# Altium PCB PCB1.PcbDoc
Units mil, origin at the board's own origin, x right, y up, seen from the top; angles counter-clockwise.
Board outline 2010 x 2300 mil, 2 copper layers (Top Layer, Bottom Layer); 6 components, 5 nets, 21 pads, 0 vias.
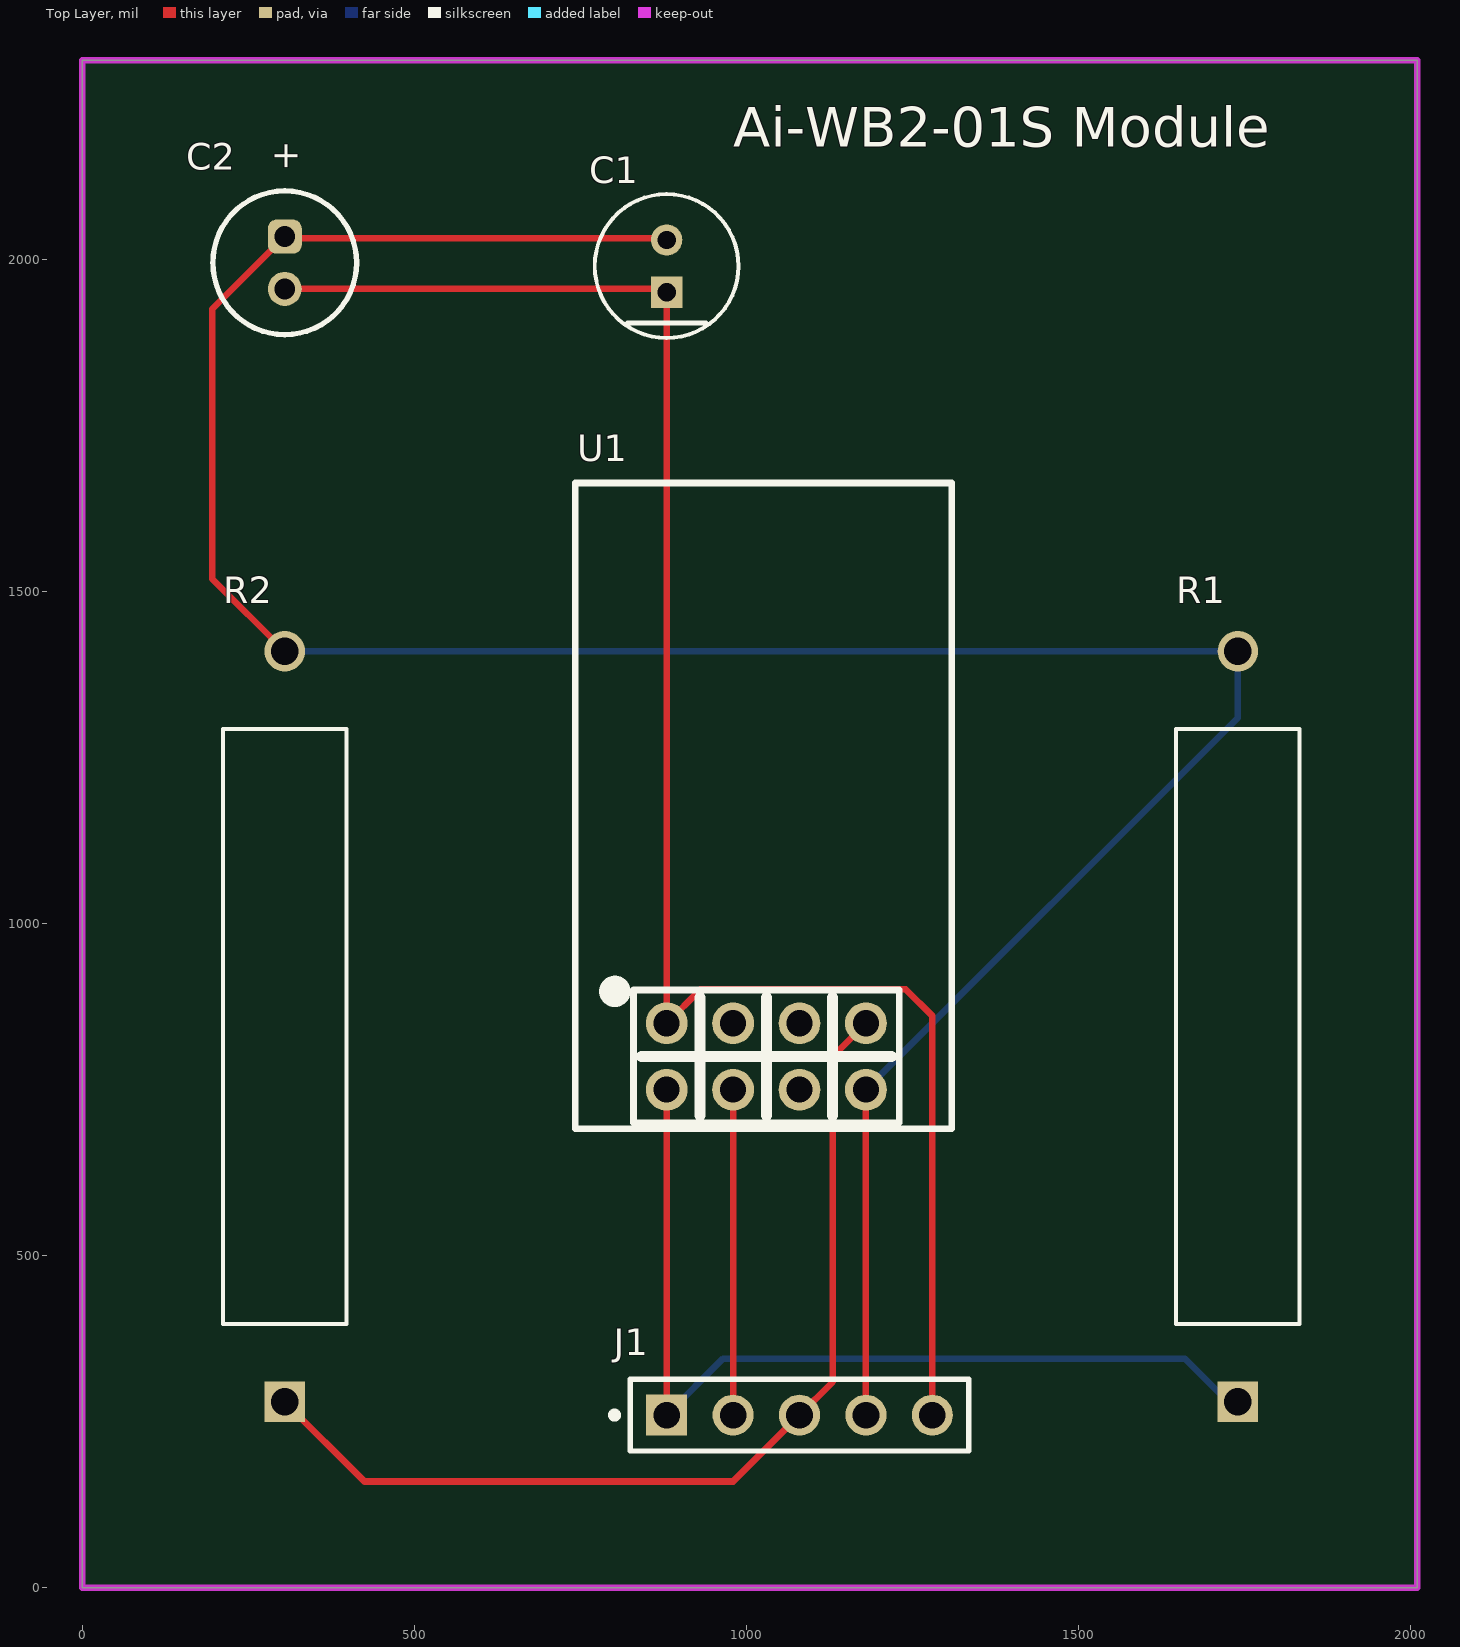
[diagram p0: Top Layer view]
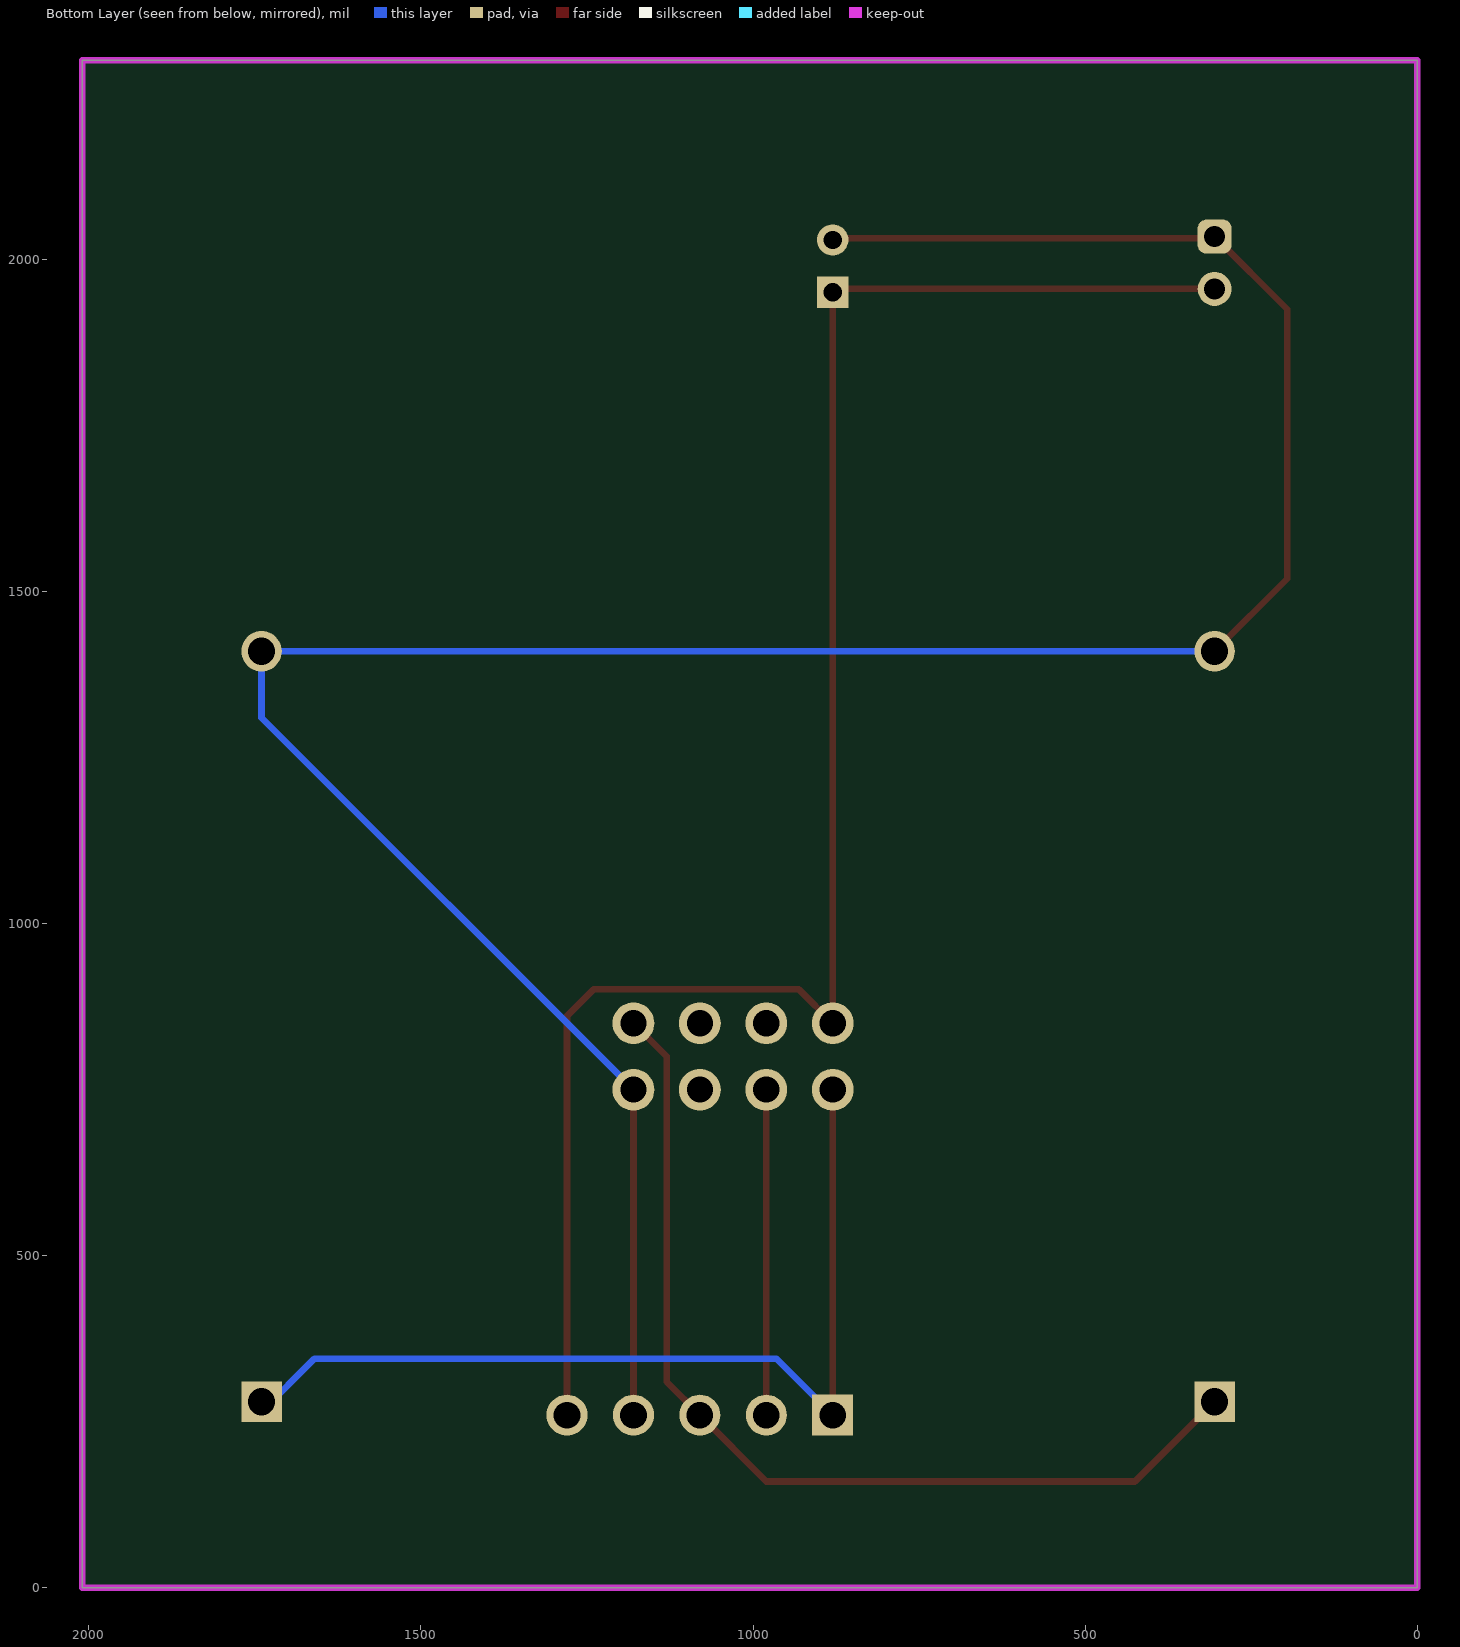
[diagram p1: Bottom Layer view, seen from below]
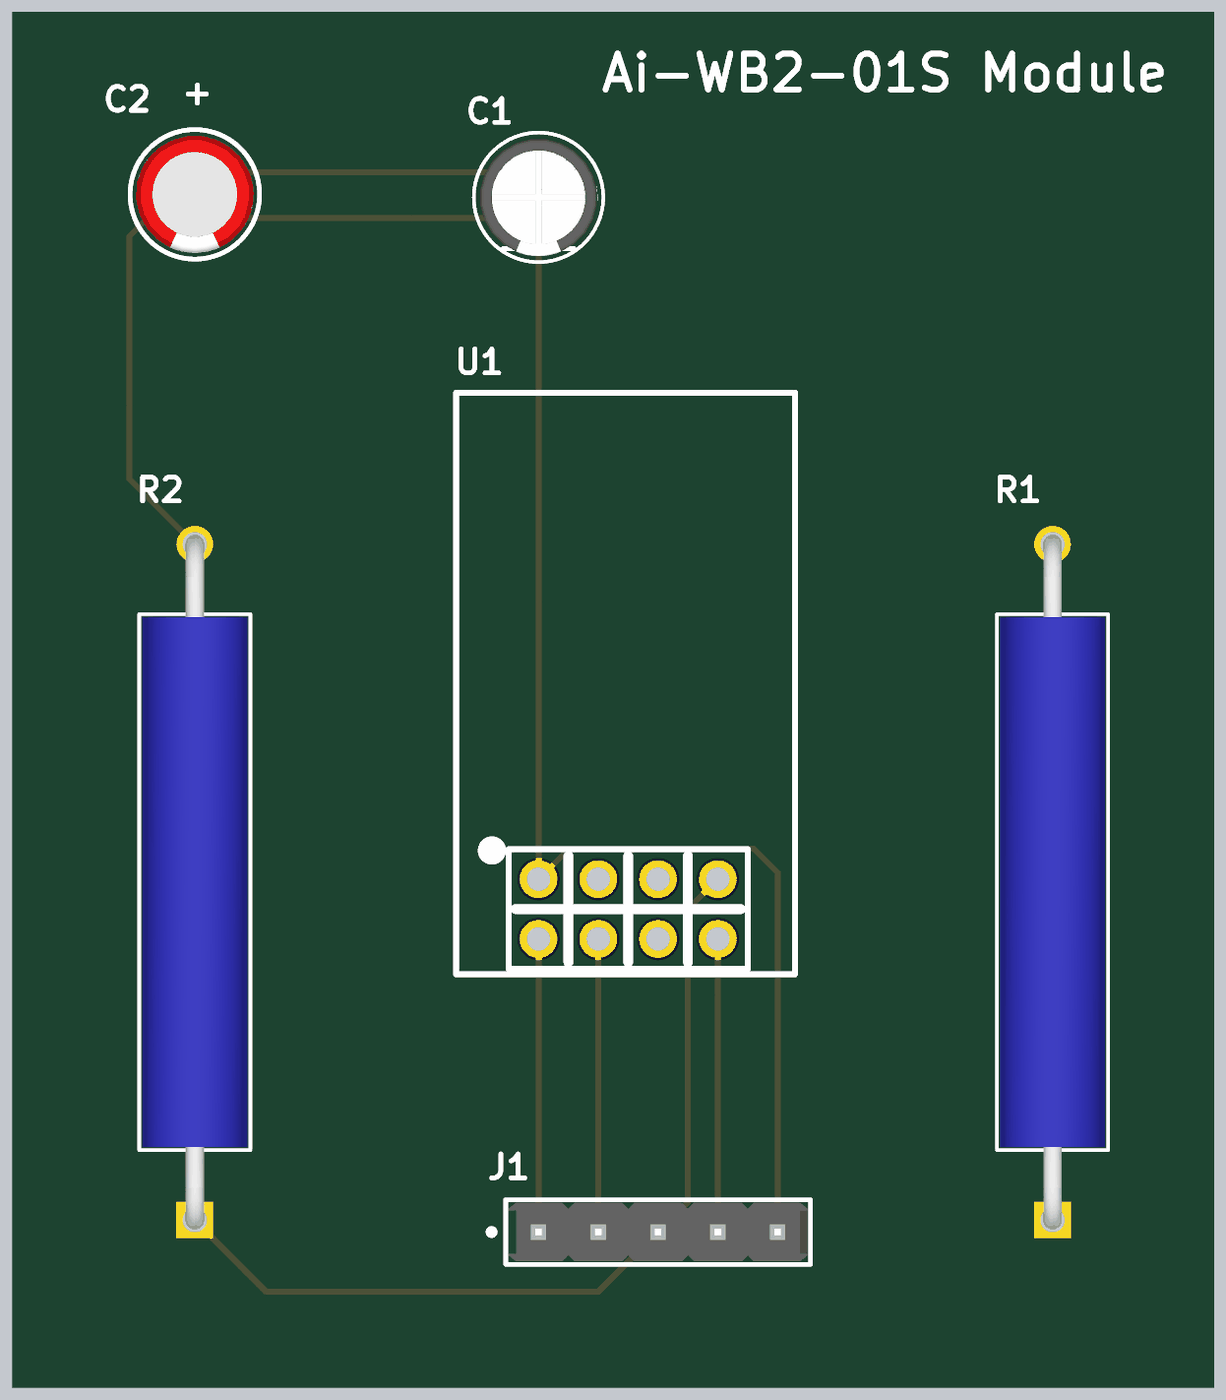
[diagram p2: 3D render of the assembled board from above, using the file's embedded part models]

## Layer stack, top to bottom
Top Solder: solder mask 0.4, Solder Resist, Dk 3.5
Top Layer: signal copper 1.4
Dielectric 1: dielectric 12.6, FR-4, Dk 4.8
Bottom Layer: signal copper 1.4
Bottom Solder: solder mask 0.4, Solder Resist, Dk 3.5

## Board outline
0,0 0,2300 2010,2300 2010,0

## Design rules (kind name [scope] priority, off if disabled: settings)
Clearance [All] p1: gap=10 ignorepadtopadclearanceinfootprint=FALSE
PolygonConnect [All] p1: connectstyle=Relief reliefconductorwidth=10 reliefentries=4 polygonreliefangle="90 Angle" airgapwidth=10
RoutingVias [All] p1: holewidth=28 width=50 viastyle="Through Hole" minholewidth=28 minwidth=50 maxholewidth=28 maxwidth=50
SolderMaskExpansion [All] p1: expansion=4 istentingtop=FALSE
SupplyNets "Schematic Supply Nets_1" [InNet('GND')] p1: voltage=0.000
SupplyNets "Schematic Supply Nets" [InNet('VCC')] p2: voltage=0.000
Width [All] p1: maxlimit=10 minlimit=10 preferedwidth=10
30 further rules are at their usual default settings.

## Components (designator, comment, footprint, x,y, rotation, side; value= is the part's Value field where it differs from the comment)
C1 "ECA2AM100" FP-RAD-TH-D_5_0_5-L_11_1-MFG 880,1990 r90 top
C2 "860010672001" WCAP-ATG8_D5H11 305,1995 r90 top
J1 "22-28-4050" FP-22-28-4050-MFG 1080,260 r0 top
R1 "OY472KE" RES_OY_OHM 1740,280 r90 top
R2 "OY472KE" RES_OY_OHM 305,280 r90 top
U1 "MODULE_ATK_AI-WB2-01S_PART" MODULE_ATK_AI-WB2-01S_PCB 1030,800 r90 top

## Footprints (in the part's own frame and the unit in brackets; to place one, negate y for a bottom-side part, rotate by r counter-clockwise, add the part's x,y. Pads: shape width x height; smd on the part's side, far side on the other; paste and mask are expansions set on the pad)
FP-22-28-4050-MFG [mm]
  rect 1.57x1.57 hole 1.02 paste-2539.97 mask+0: 1(-5.08,0)
  round 1.57 hole 1.02 paste-2539.97 mask+0: 2(-2.54,0) 3(0,0) 4(2.54,0) 5(5.08,0)
  silkscreen extent -7.2,-1.37 6.48,1.37, body extent -6.58,-1.47 6.58,1.47, height 0.25
FP-RAD-TH-D_5_0_5-L_11_1-MFG [mm]
  rect 1.2x1.2 hole 0.7 paste-2539.97 mask+0: 1(-1,0)
  round 1.2 hole 0.7 paste-2539.97 mask+0: 2(1,0)
  silkscreen extent -2.75,-2.75 2.75,2.75, body extent -2.85,-2.85 2.85,2.85, height 0.25
MODULE_ATK_AI-WB2-01S_PCB [mm]
  round 1.6 hole 1: 1(1.27,3.81) 2(1.27,1.27) 3(1.27,-1.27) 4(1.27,-3.81) 5(-1.27,3.81) 6(-1.27,1.27) 7(-1.27,-1.27) 8(-1.27,-3.81)
  silkscreen extent -2.77,-7.09 21.93,7.31
RES_OY_OHM [mil]
  rect 61x61 / inner round 60 / far side rect 61x61 hole 41 paste-99999 mask+0: 1(0,0)
  round 61 / inner round 60 / far side round 61 hole 41 paste-99999 mask+0: 2(1130,0)
  silkscreen extent 117,-93 1013,93, body extent -16,-88 1146,88, height 176
WCAP-ATG8_D5H11 [mm] "Aluminum Electrolytic Capacitors, 5x11mm"
  rrect50% 1.3x1.3 hole 0.8: 1(1,0)
  round 1.3 hole 0.8: 2(-1,0)
  silkscreen extent -2.75,-2.75 2.75,2.75, body extent -2.49,-2.5 2.5,2.5, height 11.31

## Part data
C1: library part CMP-05427-000869-1, "Aluminum Electrolytic Capacitors (Radial Lead Type) 10uF ±20% 100V", Capacitance=10uF, Case/Package=Radial, Dielectric Material=Aluminium, Leakage Current=3uA, Max Operating Temperature=85°C, Min Operating Temperature=-40°C, Package Quantity=200, Ripple Current=70mA, Tolerance=20%, Voltage=100V, Construction=RADIAL, Contact Plating=Tin, Diameter=5mm, Dissipation Factor=0.1%, Height=11mm, Height - Seated (Max)=0.472inch, Lead Diameter=0.5mm, Lead Free="Lead Free", Lead Pitch=2mm, Lead/Base Style=Straight, Length=11mm, Life (Hours)=2000Hour, Mount="Through Hole", Number of Pins=2, Packaging=Bulk, Polarity=Polar, Radiation Hardening=No, REACH SVHC="No SVHC", Ripple Current (AC)=70mA, RoHS Compliant=Yes, Series=M, Termination=Radial, Voltage Rating=100V, Voltage Rating (DC)=100V, Width=5mm
C2: library part CMP-03913-54007254-1, "860010672001 Cap Aluminum Lytic 0.1uF 50V 20% (5 X 11mm) Radial 2mm 3.3mA 2000h 85C", Capacitance=100nF, Case/Package=Radial, Leakage Current=3µA, Max Operating Temperature=85°C, Min Operating Temperature=-40°C, Ripple Current=3.3mA, Tolerance=20%, Voltage Rating=50V, Diameter=5mm, Height=11mm, Height - Seated (Max)=12.4968mm, Lead Pitch=2.0066mm, Length=11mm, Life (Hours)=2000hours, Material=Aluminium, Mount="Through Hole", NexarPartId=54007254, Packaging="Tape & Box (TB)", Pitch=2mm, Polarity=Polar, REACH SVHC=Unknown, RoHS=Compliant, Voltage Rating (DC)=50V
J1: library part CMP-00257-00278173-1, "22-28-4050 KK® 254 Breakaway Header, Vertical, 5 Circuits, Tin (Sn) Plating, Mating Pin Length 6.09mm", Color=Black, Contact Resistance=20mΩ, Current Rating=4A, Flammability Rating="UL94 V-0", Max Operating Temperature=75°C, Max Voltage Rating (DC)=250.25kV, Min Operating Temperature=0°C, Voltage Rating=250V, Connector Type="Male Pin", Contact Material=Brass, Contact Mating Length=6.096mm, Contact Plating=Tin, Gender=Male, Glow Wire Compliant=Non-compliant, Height=2.29mm, Housing Color=Black, Housing Material=Thermoplastic, Lead Free="Lead Free", Lead Pitch=2.54mm, Length=12.7mm, Mount="Through Hole", NexarPartId=278173, Number of Circuits=5, Number of Contacts=5, Number of Positions=5, Number of Rows=1, Orientation=Vertical, Packaging=Bulk, Pitch=2.54mm, Radiation Hardening=No, REACH SVHC=Unknown, RoHS=Compliant, Schedule B=8536694040|8536694040|8536694040|8536694040|8536694040|8536694040|8536694040|8536694040|8536694040|8536694040|8536694040|8536694040|8536694040|8536694040|8536694040|8536694040|8536694040|8536694040|8536694040|8536694040|8536694040|8536694040|8536694040|85, Termination=Solder, Voltage Rating (DC)=250V, Width=2.49mm
R1 R2: "No Description Available", Mfr_Name=Ohmite
U1: PCB DECAL=MODULE_ATK_AI-WB2-01S_PCB

## Nets (pads, with @x,y where several pads share a name; then routed paths per layer and width w, separated by ;. In a path a pad name is that pad's centre, name@x,y a point inside that pad or via, vN(x,y) a via of type N, cw(c..) or ccw(c..) an arc to the next point about the centre after c; other vN are vias at no path point)
EN: J1.2 U1.6 | length 490
  Top Layer w10: J1.2 U1.6
GND: C1.1 C2.2 J1.5 U1.1 | length 2716.4
  Top Layer w10: C2.2 875,1955.63 C1.1 U1.1 931,901 1240,901 1280,861 J1.5
RX: J1.3 R2.1 U1.4 | length 1497.5
  Top Layer w10: R2.1 425,160 980,160 J1.3 1130,310 1130,800 U1.4
TX: J1.1 R1.1 U1.5 | length 1418.3
  Top Layer w10: J1.1 U1.5
  Bottom Layer w10: J1.1 965,345 1660,345 R1.1@1740,265
VCC: C1.2 C2.1 J1.4 R1.2 R2.2 U1.8 | length 4094
  Top Layer w10: R2.2 195.63,1519.37 195.63,1925 C2.1 307.5,2031.87 877.5,2031.87 C1.2 ; J1.4 U1.8
  Bottom Layer w10: R2.2 R1.2 ; U1.8 1740,1310 R1.2@1740,1395
pads on no net: U1.2 U1.3 U1.7

## Keep-outs
Keep-Out Layer:
  the board outline again, w10

## Silkscreen, mask and mechanical layers (free items; w line width, h text height)
Top Overlay:
  text "Ai-WB2-01S Module" at 980,2170 h60

## Text inside footprints (layer, text, board x,y; h text height)
C2: Top Overlay "+" at 324.68,2132.8 h40 r90